# Altium PCB 555 Clocked LED.PcbDoc
Units mm, origin at the board's own origin, x right, y up, seen from the top; angles counter-clockwise.
Board outline 26.1 x 15.7 mm, 2 copper layers (Top Layer, Bottom Layer), stack 1.671 mm thick; 7 components, 6 nets, 22 pads, 2 vias.
Unrouted connection lines stored in the file: 1.
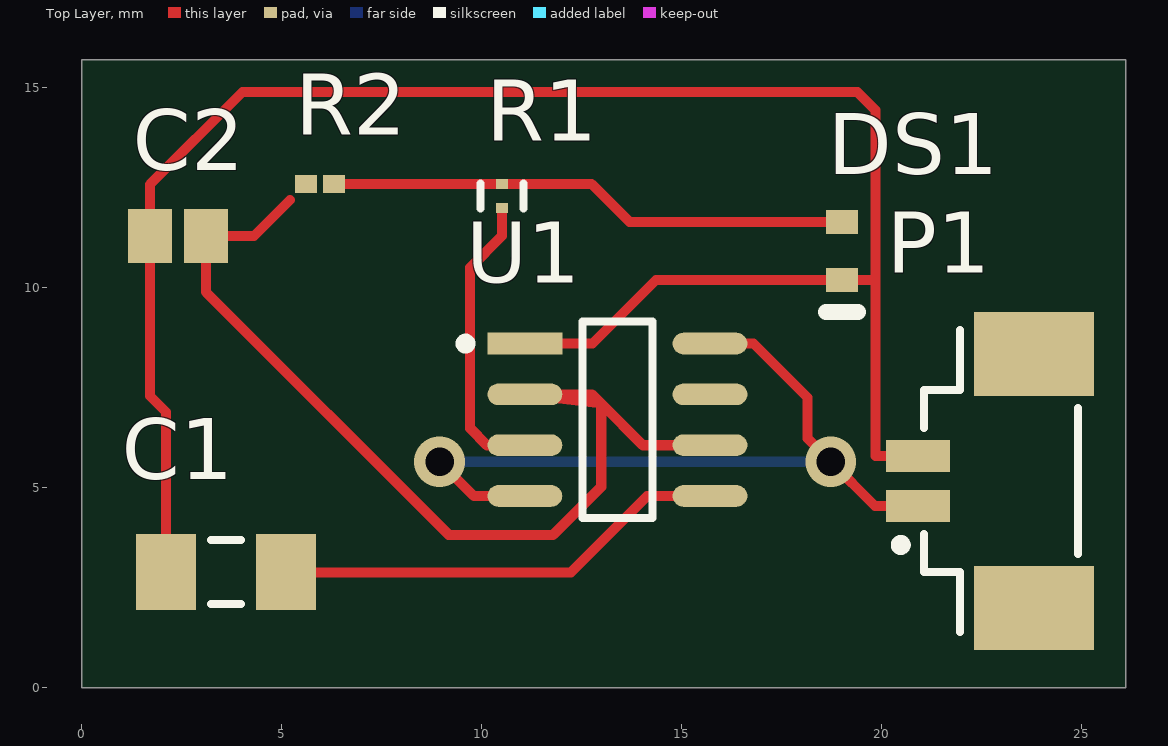
[diagram p0: Top Layer view]
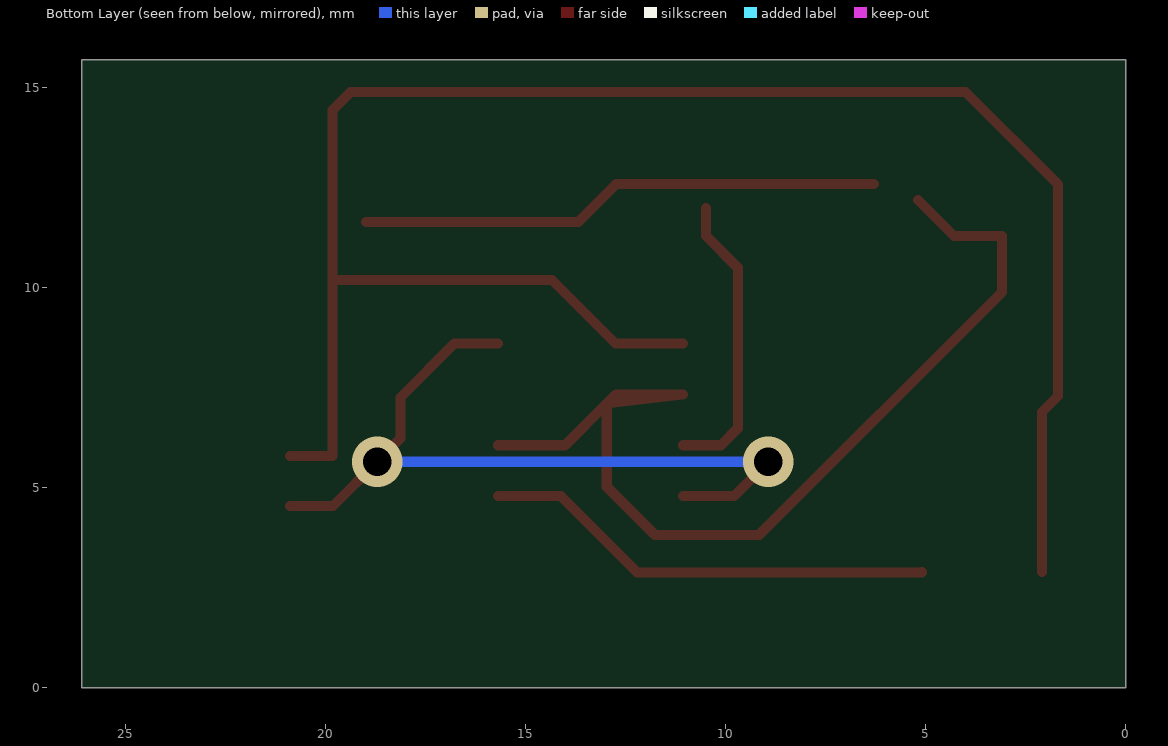
[diagram p1: Bottom Layer view, seen from below]
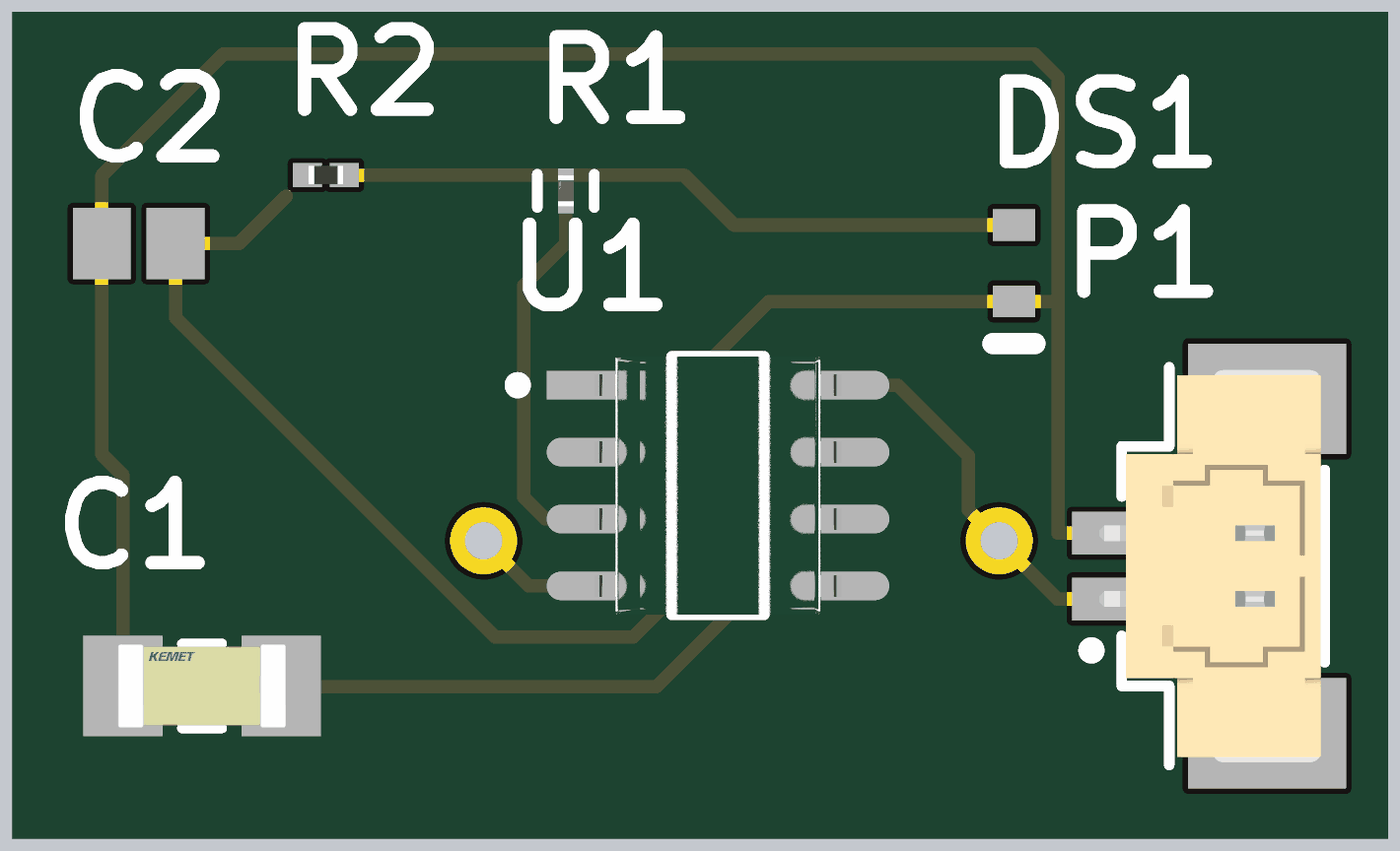
[diagram p2: 3D render of the assembled board from above, using the file's embedded part models]

## Layer stack, top to bottom
Top Solder: solder mask 0.0102, Solder Resist, Dk 3.5
Top Layer: signal copper 0.0356
Dielectric 1: dielectric 1.6, FR-4, Dk 4.8
Bottom Layer: signal copper 0.0356
Bottom Solder: solder mask 0.0102, Solder Resist, Dk 3.5

## Board outline
0,15.7 0,0 26.1,0 26.1,15.7

## Design rules (kind name [scope] priority, off if disabled: settings)
Clearance [All] p1: gap=0.3 ignorepadtopadclearanceinfootprint=FALSE
PolygonConnect [All] p1: connectstyle=Relief reliefconductorwidth=0.254 reliefentries=4 polygonreliefangle="90 Angle" airgapwidth=0.254
RoutingVias [All] p1: holewidth=0.711 width=1.27 viastyle="Through Hole" minholewidth=0.711 minwidth=1.27 maxholewidth=0.711 maxwidth=1.27
SolderMaskExpansion [All] p1: expansion=0.102 istentingtop=FALSE
Width [All] p1: maxlimit=0.254 minlimit=0.254 preferedwidth=0.254
30 further rules are at their usual default settings.

## Components (designator, comment, footprint, x,y, rotation, side; value= is the part's Value field where it differs from the comment)
C1 "C1206C104K2RACTU" FP-C1206C-EB-IPC_A 3.6,2.9 r0 top value="0.10 μF"
C2 "C0805F103K5RACTU" CAPC2013X100X50LL20T25 2.4,11.3 r0 top
DS1 "TLMS1100-GS08" VISH-TLMX1100_V 19,10.925 r270 top
P1 "653102124022" 653102124022 22.97,5.175 r90 top
R1 "ERJ-1GNF1001C" FP-ERJ1GN-MFG 10.5,12.3 r90 top
R2 "CRCW02010000Z0ED" RESC0603X28X15ML5T05 5.95,12.6 r180 top
U1 "NE555DR" FP-D0008A-IPC_C 13.386,6.705 r0 top

## Footprints (in the part's own frame and the unit in brackets; to place one, negate y for a bottom-side part, rotate by r counter-clockwise, add the part's x,y. Pads: shape width x height; smd on the part's side, far side on the other; paste and mask are expansions set on the pad)
653102124022 [mm] "1.25mm SMT Male Vertical Shrouded Header, 2p"
  rect 0.81x1.6 smd: 1(-0.625,2.07) 2(0.625,2.07)
  rect 2.1x3 smd: MP1(-3.175,-0.83) MP2(3.175,-0.83)
  silkscreen extent -3.78,-1.92 3.77,2.62, body extent -3.72,-1.85 3.72,2.36, height 4.74
CAPC2013X100X50LL20T25 [mm] "Chip Capacitor, 2-Leads, Body 2.00x1.25mm, IPC High Density"
  rect 1.1x1.35 smd: 1(-0.7,0) 2(0.7,0)
  body extent -1.1,-0.72 1.1,0.72, height 1
FP-C1206C-EB-IPC_A [mm]
  rect 1.505x1.906 smd paste+0 mask+0: 1(-1.501,0) 2(1.501,0)
  silkscreen extent -0.37,-0.8 0.37,0.8, body extent -2.75,-1.45 2.75,1.45, height 0.25
FP-D0008A-IPC_C [mil]
  rect 73.59x21.34 smd paste+0 mask+0: 1(-91.09,75)
  rrect100% 73.59x21.34 smd paste+0 mask+0: 2(-91.09,25) 3(-91.09,-25) 4(-91.09,-75) 5(91.08,-75) 6(91.08,-25) 7(91.08,25) 8(91.08,75)
  silkscreen extent -154,-97 35,97, body extent -132,-100 132,100, height 10
FP-ERJ1GN-MFG [mm]
  rect 0.25x0.3 smd paste+0 mask+0: 1(-0.3,0) 2(0.3,0)
  silkscreen extent -0.32,-0.54 0.31,0.54, body extent -0.53,-0.27 0.53,0.27, height 0.25
RESC0603X28X15ML5T05 [mm] "Chip Resistor, 2-Leads, Body 0.65x0.35mm, IPC Low Density"
  rect 0.55x0.45 smd: 1(-0.35,0) 2(0.35,0)
  body extent -0.33,-0.18 0.33,0.18, height 0.28
VISH-TLMX1100_V [mm] "SMD, 2-Leads, Body 1.6x0.8mm"
  rect 0.6x0.8 smd: 1(-0.725,0) 2(0.725,0)
  silkscreen extent 1.52,-0.4 1.52,0.4, body extent -0.8,-0.4 0.8,0.4, height 0.65

## Part data
C1: library part CMP-1037-04222-2, "CAP CER 0.1UF 200V 10% X7R 1206", Capacitance="0.10 μF", Manufacturer=KEMET, Package=C1206C-EB, Temperature="-55°C to +150°C", Temperature Characteristic=X7R, Temperature Coefficient=15%, Temperature Range High=+150°C, Temperature Range Low=-55°C, Tolerance=0.1, Voltage Rating="200 V", Automotive=Yes, Automotive Grade="Grade 0", Category=Cap, ComponentLink2Description=Datasheet, ComponentLink2URL=https://content.kemet.com/datasheets/KEM_C1007_X8R_ULTRA_150C_SMD.pdf, Device Class L1="Passive Components", Device Class L2=Capacitors, Device Class L3="Ceramic Capacitors", Digikey Description="CAP CER 0.1UF 200V 10% X7R 1206", Height=0.88mm, Ipc Land Pattern Name=CAPC320160X78, Lead Free=Yes, Manufacturer Part Number=C1206C104K2RACTU, Material=Ceramic, Mouser Description="Multilayer Ceramic Capacitors MLCC - SMD/SMT 200volts 0.1uF X7R 10%", Octopart=https://octopart.com/c1206c104k2ractu-kemet-9138344, RoHS=TRUE
C2: library part CMP-2007-03708-1, Manufacturer=Kemet, Part Number=C0805F103K5RACTU
DS1: library part CMP-1666-00027-1, "LED, RED, 2.1 V, -40 to 100 degC, 2-Pin SMD (0603), RoHS, Tape and Reel", Capacitance="12 pF", Case Code (Imperial)=0603, Case Code (Metric)=1608, Max Operating Temperature=125degC, Min Operating Temperature=-55degC, Package Quantity=4000, Resistance="100000000000 Ohm", Tolerance=5%, Type (Capacitors)=C0G, Voltage Rating="50 V", Case/Package=0603, ComponentLink1Description="Manufacturer URL", ComponentLink1URL=http://www.vishay.com/, ComponentLink2Description=Datasheet, ComponentLink2URL=http://www.vishay.com/docs/83173/tlmb1100.pdf, DatasheetVersion="Rev. 2.7, 03/2016", Height="0.8 mm", Length="1.6 mm", Mount="Surface Mount", PackageDescription="2-Pin Surface Mount Device, Body 1.6 x 0.8 mm", PackageReference=TLMX1100, Packaging="Tape and Reel", Pins=2, Radiation Hardening=No, REACH SVHC="No SVHC", RoHSCompliant=True, Voltage Rating (DC)="50 V", Width="0.8 mm"
P1: library part CMP-1502-00757-2, Color="Beige, White", Contact Resistance=20mΩ, Current Rating=1A, Flammability Rating="UL94 V-0", Insulation Resistance=100MΩ, Max Operating Temperature=85°C, Min Operating Temperature=-40°C, Operating Supply Voltage=125V, Connector Type="Male Pin", Contact Gender=Male, Contact Material=Copper, Contact Mating Length=2.159mm, Contact Plating=Tin, Gender=Male, Height=4.75mm, Housing Material=Nylon, Insulation=Insulated, Lead Pitch=1.25mm, Length=7.25mm, Mount="Surface Mount", NexarPartId=18818273, Number of Contacts=2, Number of Pins=2, Number of Positions=2, Number of Rows=1, Orientation=Vertical, Packaging="Tape and Reel", Pitch=1.25mm, REACH SVHC=Unknown, RoHS=Compliant, Termination=SMD/SMT, Voltage Rating=125V, Width=7.25mm
R1: library part CMP-1010-00416-3, "RES SMD 1K OHM 1% 1/20W 0201", Case Code (Imperial)=0201, Case Code (Metric)=0603, Max Operating Temperature=125°C, Max Power Dissipation=50mW, Min Operating Temperature=-55°C, Package Quantity=15000, Resistance=1kR, Resistance Tolerance=1%, Resistor Type="Thick Film", Temperature Coefficient=200ppm/°C, Voltage Rating=25V, Case/Package=0201, Contact Plating=Tin, Features="Automotive AEC-Q200", Height=0.01inch, Lead Free="Lead Free", Length=0.6mm, Mount="Surface Mount", Number of Pins=2, Number of Terminations=2, Packaging="Tape and Reel", Power Rating=50mW, Radiation Hardening=No, RoHS Compliant=Yes, Series=ERJ, Size Code=0201, Termination=SMD/SMT, Tolerance=1%, Voltage Rating (DC)=25V, Weight=6E-06oz, Width=0.012inch
R2: library part CMP-2004-00001-2, "Chip Resistor, 0 Ohm, Jumper, 0.05 W, -55 to 155 degC, 0201 (0603 Metric), RoHS, Tape and Reel", Case Code (Imperial)=0201, Case Code (Metric)=0603, Max Operating Temperature="155 degC", Min Operating Temperature="-55 degC", Package Quantity=1, Power Rating="50 mW", Resistance="0 mohm", Tolerance=5%, Voltage Rating="30 V", Case\Package=0201, ComponentLink1Description="Manufacturer URL", ComponentLink1URL=http://www.vishay.com/, ComponentLink2Description=Datasheet, ComponentLink2URL=http://www.vishay.com/docs/20052/crcw0201e3.pdf, DatasheetVersion=03/2016, Height="0.23 mm", Length="0.6 mm", Mount="Surface Mount", Mounting Technology="Surface Mount", PackageDescription="2-Pin Surface Mount Device, Body 0.6 x 0.3 mm", PackageReference=0201, Packaging="Cut Tape", Radiation Hardening=No, REACH SVHC=Unknown, RoHSCompliant=true, Weight="6E-06 oz", Width="0.3 mm"
U1: library part CMP-1685-00007-2, "IC OSC SGL TIMER 100KHZ 8-SOIC", Case/Package=SOIC, Frequency=100kHz, High Level Output Current=-200mA, Low Level Output Current=200mA, Max Operating Temperature=70°C, Max Supply Voltage=16V, Min Operating Temperature=0°C, Min Supply Voltage=4.5V, Operating Supply Current=10mA, Package Quantity=2500, Quiescent Current=15mA, Contact Plating=Gold, Height=1.58mm, Lead Free="Lead Free", Length=4.9mm, Mount="Surface Mount", Number of Pins=8, Number of Timers/Counters=1, Packaging="Tape and Reel", Radiation Hardening=No, REACH SVHC="No SVHC", Weight=0.002561oz, Width=3.91mm

## Via types
v1: diameter 1.27, hole 0.711, Top Layer to Bottom Layer, 2 vias

## Nets (pads, with @x,y where several pads share a name; then routed paths per layer and width w, separated by ;. In a path a pad name is that pad's centre, name@x,y a point inside that pad or via, vN(x,y) a via of type N, cw(c..) or ccw(c..) an arc to the next point about the centre after c; other vN are vias at no path point)
+5: P1.1 U1.4 U1.8 | length 19.7
  Top Layer w0.254: v1(8.941,5.656) 9.797,4.8 U1.4 ; U1.8 16.79,8.61 18.136,7.264 18.136,6.24 v1(18.72,5.656) 19.826,4.55 P1.1
  Bottom Layer w0.254: v1(8.941,5.656) v1(18.72,5.656)
GND: C1.1 C2.1 DS1.2 P1.2 U1.1 | length 48.3
  Top Layer w0.254: C1.1 2.099,6.9 1.7,7.3 C2.1 1.7,12.59 4.011,14.901 19.381,14.901 19.838,14.444 19.838,10.2 ; U1.1 12.762,8.61 14.352,10.2 DS1.2 19.838,10.2 ; P1.2 19.838,5.8 19.838,10.2
NetC1_2: C1.2 U1.5 | length 11.4
  Top Layer w0.254: C1.2 5.101,2.887 12.218,2.887 14.131,4.8 U1.5
NetC2_2: C2.2 R2.2 U1.2 U1.6 | length 25.9
  Top Layer w0.254: 5.2,12.2 4.3,11.3 C2.2 3.1,9.897 9.17,3.827 11.778,3.827 12.98,5.029 12.98,7.111 ; U1.6 14.021,6.07 12.98,7.111 ; 12.98,7.111 12.751,7.34 U1.2 12.98,7.111
NetDS1_1: DS1.1 R1.2 R2.1 | length 13.1
  Top Layer w0.254: R2.1 R1.2 12.741,12.6 13.691,11.65 DS1.1
NetR1_1: R1.1 U1.3 | length 7.4
  Top Layer w0.254: R1.1 10.5,11.304 9.703,10.507 9.703,6.489 10.123,6.07 U1.3
pads on no net: P1.MP1 P1.MP2 U1.7